# Altium PCB 8Relay.PcbDoc (part 1 of 2)
Units mm, origin at the board's own origin, x right, y up, seen from the top; angles counter-clockwise.
Board outline 164.68 x 100.38 mm, 2 copper layers (Top Layer, Bottom Layer); 122 components, 159 nets, 559 pads, 183 vias.
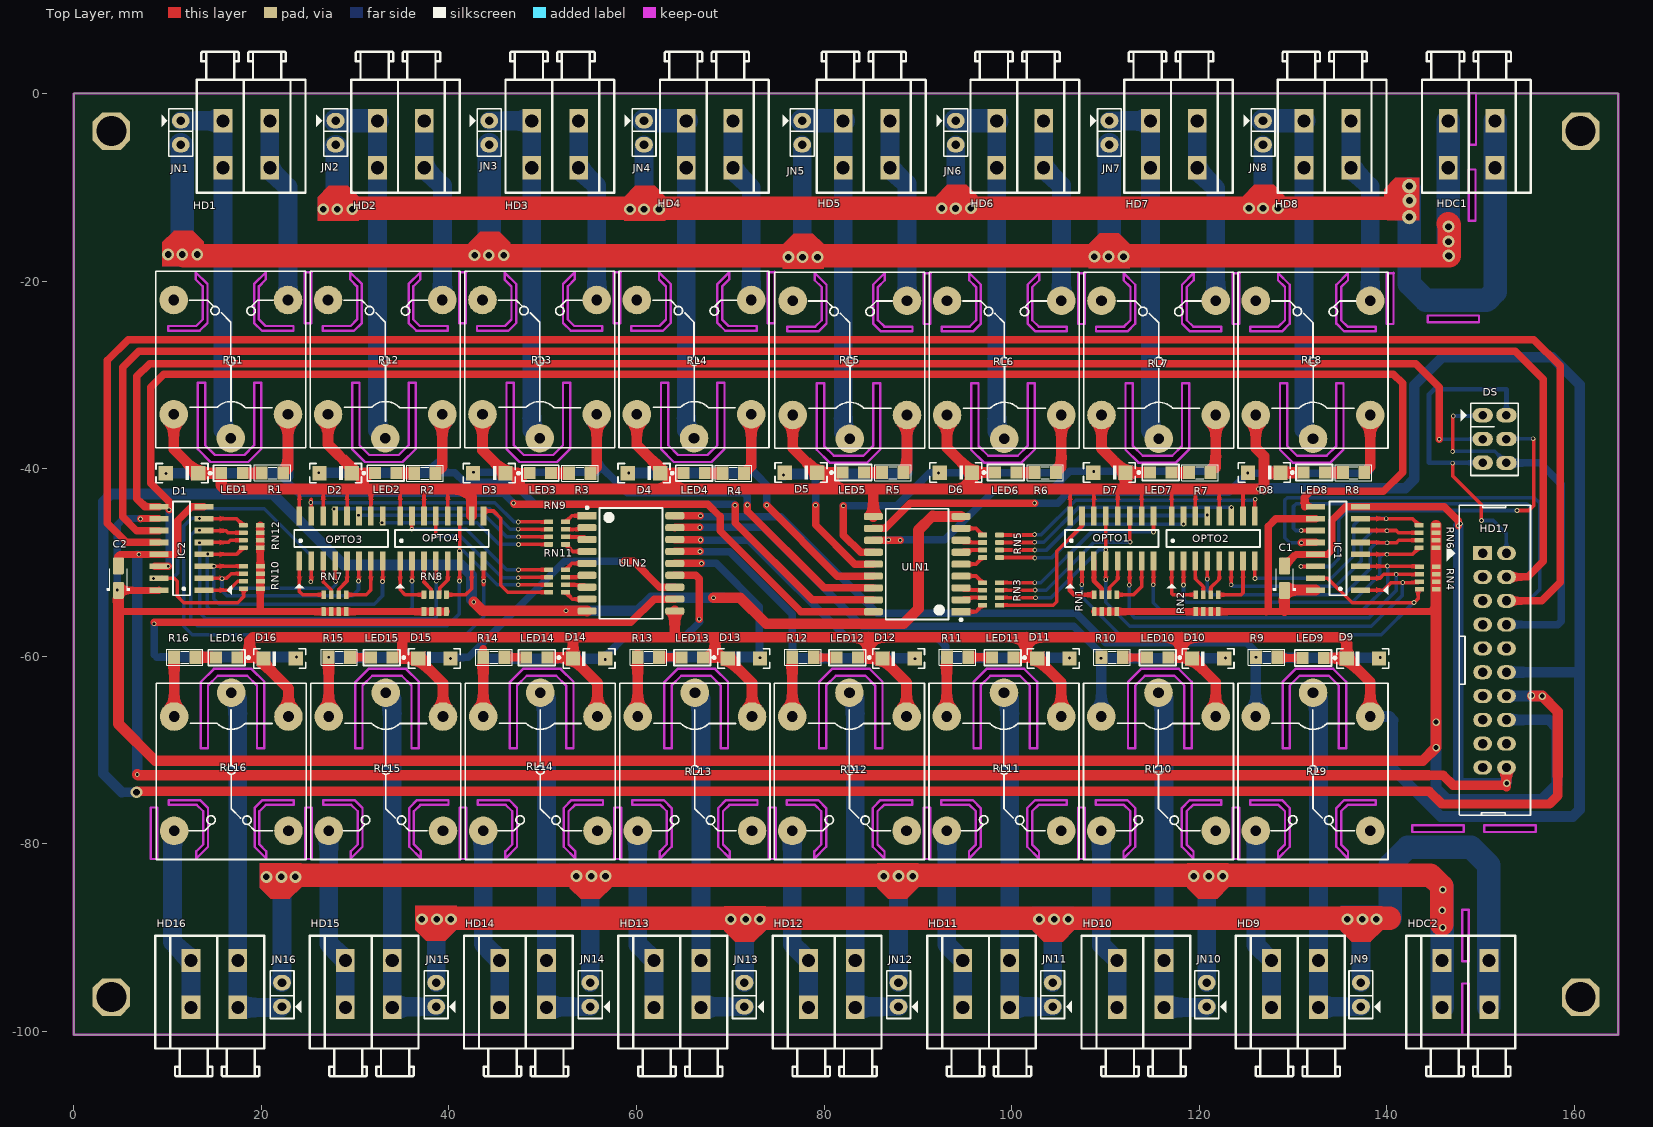
[diagram p0: Top Layer view]
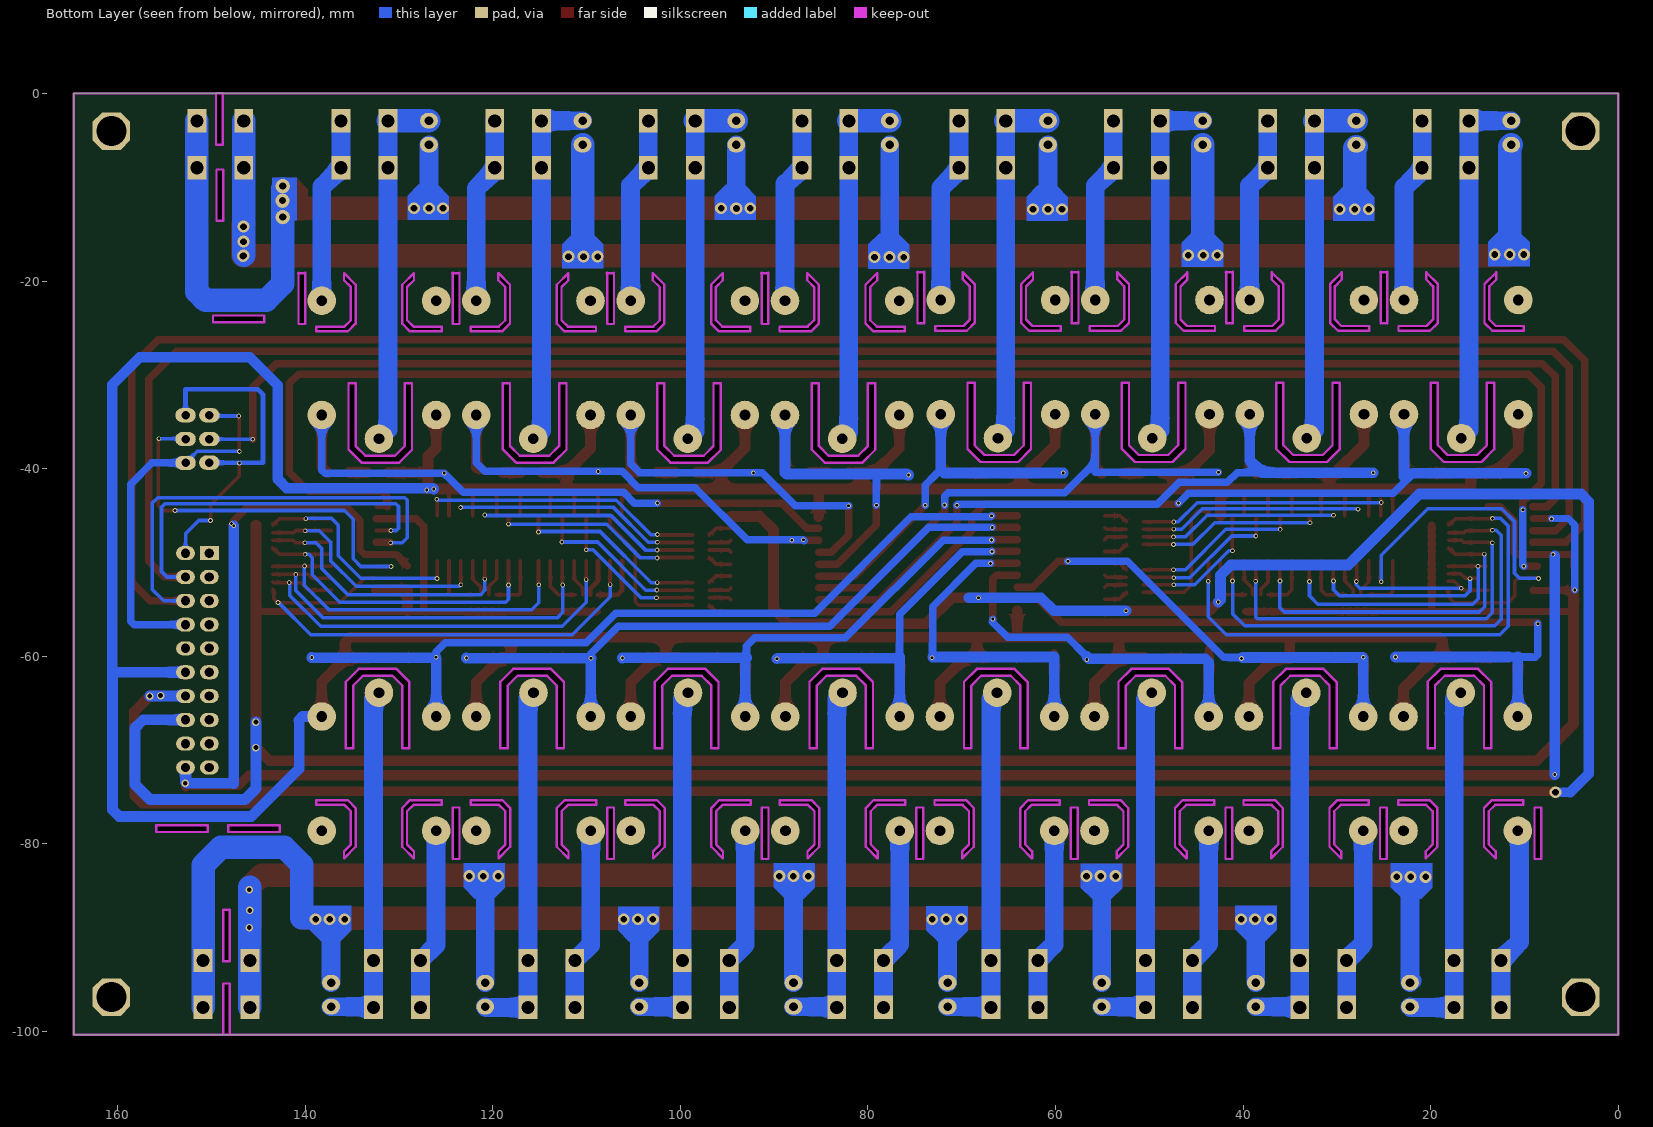
[diagram p1: Bottom Layer view, seen from below]

## Layer stack, top to bottom
Top Solder: solder mask 0.0102, Solder Resist, Dk 3.5
Top Layer: signal copper 0.0356
Dielectric 1: dielectric 0.32, FR-4, Dk 4.8
Bottom Layer: signal copper 0.0356
Bottom Solder: solder mask 0.0102, Solder Resist, Dk 3.5

## Board outline
0,-100.381 0,0 164.68,0 164.68,-100.381
cut-out: 144.367,-23.673 149.853,-23.673 149.853,-24.384 144.367,-24.384
cut-out: 150.412,-78.054 155.899,-78.054 155.899,-78.765 150.412,-78.765
cut-out: 142.716,-78.054 148.202,-78.054 148.202,-78.765 142.716,-78.765
cut-out: 124.276,-76.149 124.276,-81.636 123.564,-81.636 123.564,-76.149
cut-out: 138.83,-75.362 138.83,-75.87 135.833,-75.87 135.147,-76.556 135.147,-80.086 135.883,-80.823 135.883,-81.585 134.639,-80.34 134.639,-76.2 135.477,-75.362
cut-out: 125.469,-75.362 125.469,-75.87 128.467,-75.87 129.152,-76.556 129.152,-80.086 128.416,-80.823 128.416,-81.585 129.66,-80.34 129.66,-76.2 128.822,-75.362
cut-out: 107.795,-76.149 107.795,-81.636 107.083,-81.636 107.083,-76.149
cut-out: 122.349,-75.362 122.349,-75.87 119.352,-75.87 118.666,-76.556 118.666,-80.086 119.402,-80.823 119.402,-81.585 118.158,-80.34 118.158,-76.2 118.996,-75.362
cut-out: 108.988,-75.362 108.988,-75.87 111.986,-75.87 112.671,-76.556 112.671,-80.086 111.935,-80.823 111.935,-81.585 113.179,-80.34 113.179,-76.2 112.341,-75.362
cut-out: 91.314,-76.149 91.314,-81.636 90.602,-81.636 90.602,-76.149
cut-out: 105.868,-75.362 105.868,-75.87 102.871,-75.87 102.185,-76.556 102.185,-80.086 102.921,-80.823 102.921,-81.585 101.677,-80.34 101.677,-76.2 102.515,-75.362
cut-out: 92.507,-75.362 92.507,-75.87 95.505,-75.87 96.19,-76.556 96.19,-80.086 95.454,-80.823 95.454,-81.585 96.698,-80.34 96.698,-76.2 95.86,-75.362
cut-out: 74.833,-76.149 74.833,-81.636 74.121,-81.636 74.121,-76.149
cut-out: 89.387,-75.362 89.387,-75.87 86.39,-75.87 85.704,-76.556 85.704,-80.086 86.44,-80.823 86.44,-81.585 85.196,-80.34 85.196,-76.2 86.034,-75.362
cut-out: 76.026,-75.362 76.026,-75.87 79.024,-75.87 79.709,-76.556 79.709,-80.086 78.973,-80.823 78.973,-81.585 80.218,-80.34 80.218,-76.2 79.379,-75.362
cut-out: 58.352,-76.149 58.352,-81.636 57.641,-81.636 57.641,-76.149
cut-out: 72.906,-75.362 72.906,-75.87 69.909,-75.87 69.223,-76.556 69.223,-80.086 69.96,-80.823 69.96,-81.585 68.715,-80.34 68.715,-76.2 69.553,-75.362
cut-out: 59.546,-75.362 59.546,-75.87 62.543,-75.87 63.229,-76.556 63.229,-80.086 62.492,-80.823 62.492,-81.585 63.737,-80.34 63.737,-76.2 62.898,-75.362
cut-out: 41.871,-76.149 41.871,-81.636 41.16,-81.636 41.16,-76.149
cut-out: 56.425,-75.362 56.425,-75.87 53.428,-75.87 52.742,-76.556 52.742,-80.086 53.479,-80.823 53.479,-81.585 52.234,-80.34 52.234,-76.2 53.072,-75.362
cut-out: 43.065,-75.362 43.065,-75.87 46.062,-75.87 46.748,-76.556 46.748,-80.086 46.011,-80.823 46.011,-81.585 47.256,-80.34 47.256,-76.2 46.417,-75.362
cut-out: 25.39,-76.149 25.39,-81.636 24.679,-81.636 24.679,-76.149
cut-out: 39.944,-75.362 39.944,-75.87 36.947,-75.87 36.261,-76.556 36.261,-80.086 36.998,-80.823 36.998,-81.585 35.753,-80.34 35.753,-76.2 36.591,-75.362
cut-out: 26.584,-75.362 26.584,-75.87 29.581,-75.87 30.267,-76.556 30.267,-80.086 29.53,-80.823 29.53,-81.585 30.775,-80.34 30.775,-76.2 29.936,-75.362
cut-out: 8.909,-76.149 8.909,-81.636 8.198,-81.636 8.198,-76.149
cut-out: 23.463,-75.362 23.463,-75.87 20.466,-75.87 19.78,-76.556 19.78,-80.086 20.517,-80.823 20.517,-81.585 19.272,-80.34 19.272,-76.2 20.11,-75.362
cut-out: 10.103,-75.362 10.103,-75.87 13.1,-75.87 13.786,-76.556 13.786,-80.086 13.049,-80.823 13.049,-81.585 14.294,-80.34 14.294,-76.2 13.455,-75.362
cut-out: 140.024,-24.587 140.024,-19.101 140.735,-19.101 140.735,-24.587
cut-out: 125.469,-25.375 125.469,-24.867 128.467,-24.867 129.152,-24.181 129.152,-20.65 128.416,-19.914 128.416,-19.152 129.66,-20.396 129.66,-24.536 128.822,-25.375
cut-out: 138.83,-25.375 138.83,-24.867 135.833,-24.867 135.147,-24.181 135.147,-20.65 135.883,-19.914 135.883,-19.152 134.639,-20.396 134.639,-24.536 135.477,-25.375
cut-out: 123.556,-24.587 123.556,-19.101 124.267,-19.101 124.267,-24.587
cut-out: 109.002,-25.375 109.002,-24.867 111.999,-24.867 112.685,-24.181 112.685,-20.65 111.948,-19.914 111.948,-19.152 113.193,-20.396 113.193,-24.536 112.355,-25.375
cut-out: 122.362,-25.375 122.362,-24.867 119.365,-24.867 118.679,-24.181 118.679,-20.65 119.416,-19.914 119.416,-19.152 118.171,-20.396 118.171,-24.536 119.009,-25.375
cut-out: 107.088,-24.587 107.088,-19.101 107.8,-19.101 107.8,-24.587
cut-out: 92.534,-25.375 92.534,-24.867 95.531,-24.867 96.217,-24.181 96.217,-20.65 95.481,-19.914 95.481,-19.152 96.725,-20.396 96.725,-24.536 95.887,-25.375
cut-out: 105.895,-25.375 105.895,-24.867 102.897,-24.867 102.212,-24.181 102.212,-20.65 102.948,-19.914 102.948,-19.152 101.704,-20.396 101.704,-24.536 102.542,-25.375
cut-out: 90.621,-24.587 90.621,-19.101 91.332,-19.101 91.332,-24.587
cut-out: 76.066,-25.375 76.066,-24.867 79.064,-24.867 79.749,-24.181 79.749,-20.65 79.013,-19.914 79.013,-19.152 80.257,-20.396 80.257,-24.536 79.419,-25.375
cut-out: 89.427,-25.375 89.427,-24.867 86.43,-24.867 85.744,-24.181 85.744,-20.65 86.48,-19.914 86.48,-19.152 85.236,-20.396 85.236,-24.536 86.074,-25.375
cut-out: 74.009,-24.511 74.009,-19.025 74.72,-19.025 74.72,-24.511
cut-out: 59.455,-25.298 59.455,-24.79 62.452,-24.79 63.138,-24.105 63.138,-20.574 62.401,-19.837 62.401,-19.075 63.646,-20.32 63.646,-24.46 62.808,-25.298
cut-out: 72.815,-25.298 72.815,-24.79 69.818,-24.79 69.132,-24.105 69.132,-20.574 69.869,-19.837 69.869,-19.075 68.624,-20.32 68.624,-24.46 69.462,-25.298
cut-out: 57.541,-24.511 57.541,-19.025 58.253,-19.025 58.253,-24.511
cut-out: 42.987,-25.298 42.987,-24.79 45.984,-24.79 46.67,-24.105 46.67,-20.574 45.934,-19.837 45.934,-19.075 47.178,-20.32 47.178,-24.46 46.34,-25.298
cut-out: 56.348,-25.298 56.348,-24.79 53.35,-24.79 52.665,-24.105 52.665,-20.574 53.401,-19.837 53.401,-19.075 52.157,-20.32 52.157,-24.46 52.995,-25.298
cut-out: 41.074,-24.511 41.074,-19.025 41.785,-19.025 41.785,-24.511
cut-out: 26.52,-25.298 26.52,-24.79 29.517,-24.79 30.203,-24.105 30.203,-20.574 29.466,-19.837 29.466,-19.075 30.711,-20.32 30.711,-24.46 29.872,-25.298
cut-out: 39.88,-25.298 39.88,-24.79 36.883,-24.79 36.197,-24.105 36.197,-20.574 36.934,-19.837 36.934,-19.075 35.689,-20.32 35.689,-24.46 36.527,-25.298
cut-out: 23.412,-25.298 23.412,-24.79 20.415,-24.79 19.729,-24.105 19.729,-20.574 20.466,-19.837 20.466,-19.075 19.221,-20.32 19.221,-24.46 20.059,-25.298
cut-out: 10.052,-25.298 10.052,-24.79 13.049,-24.79 13.735,-24.105 13.735,-20.574 12.998,-19.837 12.998,-19.075 14.243,-20.32 14.243,-24.46 13.405,-25.298
cut-out: 14.573,-39.294 13.201,-37.922 13.201,-30.836 13.989,-30.836 13.989,-37.516 15.03,-38.557 18.18,-38.557 19.221,-37.516 19.221,-30.836 19.983,-30.836 19.983,-37.897 18.586,-39.294
cut-out: 18.942,-61.366 20.313,-62.738 20.313,-69.825 19.526,-69.825 19.526,-63.144 18.485,-62.103 15.335,-62.103 14.294,-63.144 14.294,-69.825 13.532,-69.825 13.532,-62.763 14.929,-61.366
cut-out: 35.423,-61.366 36.794,-62.738 36.794,-69.825 36.007,-69.825 36.007,-63.144 34.966,-62.103 31.816,-62.103 30.775,-63.144 30.775,-69.825 30.013,-69.825 30.013,-62.763 31.41,-61.366
cut-out: 51.904,-61.366 53.275,-62.738 53.275,-69.825 52.488,-69.825 52.488,-63.144 51.447,-62.103 48.297,-62.103 47.256,-63.144 47.256,-69.825 46.494,-69.825 46.494,-62.763 47.891,-61.366
cut-out: 68.385,-61.366 69.756,-62.738 69.756,-69.825 68.969,-69.825 68.969,-63.144 67.928,-62.103 64.778,-62.103 63.737,-63.144 63.737,-69.825 62.975,-69.825 62.975,-62.763 64.372,-61.366
cut-out: 84.866,-61.366 86.237,-62.738 86.237,-69.825 85.45,-69.825 85.45,-63.144 84.408,-62.103 81.259,-62.103 80.217,-63.144 80.217,-69.825 79.455,-69.825 79.455,-62.763 80.852,-61.366
cut-out: 101.347,-61.366 102.718,-62.738 102.718,-69.825 101.931,-69.825 101.931,-63.144 100.889,-62.103 97.74,-62.103 96.698,-63.144 96.698,-69.825 95.936,-69.825 95.936,-62.763 97.333,-61.366
cut-out: 117.828,-61.366 119.199,-62.738 119.199,-69.825 118.412,-69.825 118.412,-63.144 117.37,-62.103 114.221,-62.103 113.179,-63.144 113.179,-69.825 112.417,-69.825 112.417,-62.763 113.814,-61.366
cut-out: 134.309,-61.366 135.68,-62.738 135.68,-69.825 134.893,-69.825 134.893,-63.144 133.851,-62.103 130.702,-62.103 129.66,-63.144 129.66,-69.825 128.898,-69.825 128.898,-62.763 130.295,-61.366
cut-out: 129.991,-39.37 128.619,-37.998 128.619,-30.912 129.406,-30.912 129.406,-37.592 130.448,-38.633 133.597,-38.633 134.639,-37.592 134.639,-30.912 135.401,-30.912 135.401,-37.973 134.004,-39.37
cut-out: 113.523,-39.37 112.151,-37.998 112.151,-30.912 112.939,-30.912 112.939,-37.592 113.98,-38.633 117.13,-38.633 118.171,-37.592 118.171,-30.912 118.933,-30.912 118.933,-37.973 117.536,-39.37
cut-out: 97.055,-39.37 95.684,-37.998 95.684,-30.912 96.471,-30.912 96.471,-37.592 97.513,-38.633 100.662,-38.633 101.704,-37.592 101.704,-30.912 102.466,-30.912 102.466,-37.973 101.069,-39.37
cut-out: 80.588,-39.37 79.216,-37.998 79.216,-30.912 80.003,-30.912 80.003,-37.592 81.045,-38.633 84.194,-38.633 85.236,-37.592 85.236,-30.912 85.998,-30.912 85.998,-37.973 84.601,-39.37
cut-out: 63.976,-39.294 62.604,-37.922 62.604,-30.836 63.392,-30.836 63.392,-37.516 64.433,-38.557 67.583,-38.557 68.624,-37.516 68.624,-30.836 69.386,-30.836 69.386,-37.897 67.989,-39.294
cut-out: 31.041,-39.294 29.669,-37.922 29.669,-30.836 30.457,-30.836 30.457,-37.516 31.498,-38.557 34.648,-38.557 35.689,-37.516 35.689,-30.836 36.451,-30.836 36.451,-37.897 35.054,-39.294
cut-out: 47.508,-39.294 46.137,-37.922 46.137,-30.836 46.924,-30.836 46.924,-37.516 47.966,-38.557 51.115,-38.557 52.157,-37.516 52.157,-30.836 52.919,-30.836 52.919,-37.897 51.522,-39.294
cut-out: 24.606,-24.511 24.606,-19.025 25.317,-19.025 25.317,-24.511
cut-out: 148.812,-5.461 148.812,0.025 149.523,0.025 149.523,-5.461
cut-out: 148.761,-13.589 148.761,-8.103 149.472,-8.103 149.472,-13.589
cut-out: 148.05,-100.406 148.05,-94.92 148.761,-94.92 148.761,-100.406
cut-out: 148.05,-92.532 148.05,-87.046 148.761,-87.046 148.761,-92.532

## Design rules (kind name [scope] priority, off if disabled: settings)
Clearance [All] p1: gap=0.254
PlaneConnect [All] p1: planeconnectstyle=Relief reliefexpansion=0.508 reliefentries=4 reliefconductorwidth=0.5 reliefairgap=0.254
PolygonConnect [All] p1: connectstyle=Relief reliefconductorwidth=0.5 reliefentries=4 polygonreliefangle="45 Angle" airgapwidth=0.254
RoomDefinition 8Relay [InComponentClass('8Relay')] p1: confinementstyle=ConfineIn formatcopy=TRUE lockcomponents=FALSE outline -115.831,-248.336 -65.031,-248.336 -65.031,-222.936 -115.831,-222.936
RoutingVias RoutingVias_1 [All] p1: holewidth=0.711 width=1.27 viastyle="Through Hole" minholewidth=0.711 minwidth=1.27 maxholewidth=0.711 maxwidth=1.27
RoutingVias [All] p2: holewidth=0.3 width=0.5 viastyle="Through Hole" minholewidth=0.3 minwidth=0.5 maxholewidth=0.3 maxwidth=0.5
SolderMaskExpansion [All] p1: expansion=0.102
Width Width_1 [All] p1: maxlimit=2.5 minlimit=0.5 preferedwidth=1
Width [All] p2: maxlimit=1.143 minlimit=0.381 preferedwidth=0.8
29 further rules are at their usual default settings.

## Components (designator, comment, footprint, x,y, rotation, side; value= is the part's Value field where it differs from the comment)
C1 "10uF/16V" CAPMP3216X180N 129.102,-51.689 r90 top
C2 "10uF/16V" CAPMP3216X180N 4.743,-51.689 r90 top
D1 "1N4148" 1N4148_SMD 11.525,-40.5 r0 top
D2 "1N4148" 1N4148_SMD 27.908,-40.5 r0 top
D3 "1N4148" 1N4148_SMD 44.291,-40.5 r0 top
D4 "1N4148" 1N4148_SMD 60.801,-40.5 r0 top
D5 "1N4148" 1N4148_SMD 77.54,-40.437 r0 top
D6 "1N4148" 1N4148_SMD 94.05,-40.437 r0 top
D7 "1N4148" 1N4148_SMD 110.433,-40.437 r0 top
D8 "1N4148" 1N4148_SMD 126.943,-40.437 r0 top
D9 "1N4148" 1N4148_SMD 137.458,-60.249 r180 top
D10 "1N4148" 1N4148_SMD 120.955,-60.249 r180 top
D11 "1N4148" 1N4148_SMD 104.453,-60.249 r180 top
D12 "1N4148" 1N4148_SMD 87.95,-60.249 r180 top
D13 "1N4148" 1N4148_SMD 71.447,-60.249 r180 top
D14 "1N4148" 1N4148_SMD 54.945,-60.249 r180 top
D15 "1N4148" 1N4148_SMD 38.442,-60.249 r180 top
D16 "1N4148" 1N4148_SMD 21.939,-60.249 r180 top
DS "Connector 3x2" JP3x2 151.504,-36.855 r270 top
HD1 "RL-OUT" "KF211V- 2" 23.095,-10.566 r180 top
HD2 "RL-OUT" "KF211V- 2" 39.563,-10.566 r180 top
HD3 "RL-OUT" "KF211V- 2" 56.03,-10.566 r180 top
HD4 "RL-OUT" "KF211V- 2" 72.498,-10.566 r180 top
HD5 "RL-OUT" "KF211V- 2" 89.237,-10.566 r180 top
HD6 "RL-OUT" "KF211V- 2" 105.62,-10.566 r180 top
HD7 "RL-OUT" "KF211V- 2" 122.003,-10.566 r180 top
HD8 "RL-OUT" "KF211V- 2" 138.386,-10.566 r180 top
HD9 "RL-OUT" "KF211V- 2" 125.52,-89.814 r0 top
HD10 "RL-OUT" "KF211V- 2" 109.057,-89.814 r0 top
HD11 "RL-OUT" "KF211V- 2" 92.595,-89.814 r0 top
HD12 "RL-OUT" "KF211V- 2" 76.132,-89.814 r0 top
HD13 "RL-OUT" "KF211V- 2" 59.669,-89.814 r0 top
HD14 "RL-OUT" "KF211V- 2" 43.206,-89.814 r0 top
HD15 "RL-OUT" "KF211V- 2" 26.743,-89.814 r0 top
HD16 "RL-OUT" "KF211V- 2" 10.28,-89.814 r0 top
HD17 "Header 10x2" Hed2X10S 150.234,-49.022 r270 top
HDC1 "Header 2" "KF211V- 2" 153.765,-10.566 r180 top
HDC2 "Header 2" "KF211V- 2" 143.707,-89.814 r0 top
IC1 "74HC595" SO-16 134.817,-48.514 r180 top
IC2 "74HC595" SO-16 11.474,-48.514 r180 top
JN1 "Jumper 2" JP2 11.398,-2.896 r270 top
JN2 "Jumper 2" JP2 27.908,-2.896 r270 top
JN3 "Jumper 2" JP2 44.291,-2.896 r270 top
JN4 "Jumper 2" JP2 60.801,-2.896 r270 top
JN5 "Jumper 2" JP2 77.667,-2.896 r270 top
JN6 "Jumper 2" JP2 94.05,-2.896 r270 top
JN7 "Jumper 2" JP2 110.433,-2.896 r270 top
JN8 "Jumper 2" JP2 126.816,-2.896 r270 top
JN9 "Jumper 2" JP2 137.255,-97.384 r90 top
JN10 "Jumper 2" JP2 120.818,-97.384 r90 top
JN11 "Jumper 2" JP2 104.38,-97.384 r90 top
JN12 "Jumper 2" JP2 87.943,-97.384 r90 top
JN13 "Jumper 2" JP2 71.505,-97.384 r90 top
JN14 "Jumper 2" JP2 55.068,-97.384 r90 top
JN15 "Jumper 2" JP2 38.63,-97.384 r90 top
JN16 "Jumper 2" JP2 22.193,-97.384 r90 top
LED1 "LED" LED0805 16.859,-40.488 r0 top
LED2 "LED" LED0805 33.242,-40.488 r0 top
LED3 "LED" LED0805 49.752,-40.488 r0 top
LED4 "LED" LED0805 66.135,-40.488 r0 top
LED5 "LED" LED0805 83.128,-40.424 r0 top
LED6 "LED" LED0805 99.384,-40.424 r0 top
LED7 "LED" LED0805 115.894,-40.424 r0 top
LED8 "LED" LED0805 132.277,-40.424 r0 top
LED9 "LED" LED0805 132.15,-60.198 r180 top
LED10 "LED" LED0805 115.596,-60.158 r180 top
LED11 "LED" LED0805 99.043,-60.158 r180 top
LED12 "LED" LED0805 82.489,-60.158 r180 top
LED13 "LED" LED0805 65.935,-60.158 r180 top
LED14 "LED" LED0805 49.382,-60.158 r180 top
LED15 "LED" LED0805 32.828,-60.158 r180 top
LED16 "LED" LED0805 16.275,-60.158 r180 top
OPTO1 "TLP2904" SO-16 110.687,-47.447 r90 top
OPTO2 "TLP2904" SO-16 121.507,-47.447 r90 top
OPTO3 "TLP2904" SO-16 28.492,-47.447 r90 top
OPTO4 "TLP2904" SO-16 39.236,-47.447 r90 top
R1 "1k" SM-0805 21.177,-40.475 r180 top
R2 "1k" SM-0805 37.433,-40.5 r180 top
R3 "1k" SM-0805 53.943,-40.5 r180 top
R4 "1k" SM-0805 70.326,-40.5 r180 top
R5 "1k" SM-0805 87.319,-40.437 r180 top
R6 "1k" SM-0805 103.575,-40.437 r180 top
R7 "1k" SM-0805 120.085,-40.437 r180 top
R8 "1k" SM-0805 136.468,-40.437 r180 top
R9 "1k" SM-0805 127.197,-60.122 r0 top
R10 "1k" SM-0805 110.716,-60.122 r0 top
R11 "1k" SM-0805 94.235,-60.122 r0 top
R12 "1k" SM-0805 77.754,-60.122 r0 top
R13 "1k" SM-0805 61.273,-60.122 r0 top
R14 "1k" SM-0805 44.792,-60.122 r0 top
R15 "1k" SM-0805 28.311,-60.122 r0 top
R16 "1k" SM-0805 11.83,-60.122 r0 top
RL1 "Relay 10A/12V" RL_SPDT_10A 16.732,-36.754 r90 top
RL2 "Relay 10A/12V" RL_SPDT_10A 33.2,-36.754 r90 top
RL3 "Relay 10A/12V" RL_SPDT_10A 49.667,-36.754 r90 top
RL4 "Relay 10A/12V" RL_SPDT_10A 66.135,-36.754 r90 top
RL5 "Relay 10A/12V" RL_SPDT_10A 82.747,-36.83 r90 top
RL6 "Relay 10A/12V" RL_SPDT_10A 99.214,-36.83 r90 top
RL7 "Relay 10A/12V" RL_SPDT_10A 115.682,-36.83 r90 top
RL8 "Relay 10A/12V" RL_SPDT_10A 132.15,-36.83 r90 top
RL9 "Relay 10A/12V" RL_SPDT_10A 132.15,-63.906 r270 top
RL10 "Relay 10A/12V" RL_SPDT_10A 115.669,-63.906 r270 top
RL11 "Relay 10A/12V" RL_SPDT_10A 99.188,-63.906 r270 top
RL12 "Relay 10A/12V" RL_SPDT_10A 82.707,-63.906 r270 top
RL13 "Relay 10A/12V" RL_SPDT_10A 66.226,-63.906 r270 top
RL14 "Relay 10A/12V" RL_SPDT_10A 49.745,-63.906 r270 top
RL15 "Relay 10A/12V" RL_SPDT_10A 33.264,-63.906 r270 top
RL16 "Relay 10A/12V" RL_SPDT_10A 16.783,-63.906 r270 top
RN1 "100" "RES P4 Dual 0805/2012" 110.026,-54.356 r90 top
RN2 "100" "RES P4 Dual 0805/2012" 120.847,-54.356 r90 top
RN3 "1K" "RES P4 Dual 0805/2012" 97.809,-53.365 r180 top
RN4 "1k" "RES P4 Dual 0805/2012" 144.392,-51.664 r180 top
RN5 "1K" "RES P4 Dual 0805/2012" 97.809,-48.285 r180 top
RN6 "1k" "RES P4 Dual 0805/2012" 144.367,-47.244 r180 top
RN7 "100" "RES P4 Dual 0805/2012" 27.832,-54.356 r90 top
RN8 "100" "RES P4 Dual 0805/2012" 38.525,-54.356 r90 top
RN9 "1K" "RES P4 Dual 0805/2012" 51.53,-46.888 r0 top
RN10 "1k" "RES P4 Dual 0805/2012" 18.993,-51.613 r180 top
RN11 "1K" "RES P4 Dual 0805/2012" 51.53,-51.994 r0 top
RN12 "1k" "RES P4 Dual 0805/2012" 18.967,-47.244 r180 top
ULN1 "ULN2803A" SOIC127P750X1175-18N 89.935,-50.19 r180 top
ULN2 "ULN2803A" SOIC127P750X1175-18N 59.404,-50.114 r0 top

## Footprints (in the part's own frame and the unit in brackets; to place one, negate y for a bottom-side part, rotate by r counter-clockwise, add the part's x,y. Pads: shape width x height; smd on the part's side, far side on the other; paste and mask are expansions set on the pad)
1N4148_SMD [mil]
  rect 60x60 smd: 1(-67.91,0) 2(67.91,0)
  silkscreen extent -109,-40 109,41, body extent -71,-23 67,25, height 47
CAPMP3216X180N [mm] "Capacitor, polarized, Molded Body, EIA 535BAAC size A; 3.20mm L X 1.60mm W X 1.80mm H"
  round 0.508 on Mech14: 0(0,0)
  rrect25% 1.8x1.2 smd: 1(-1.3,0) 2(1.3,0)
  silkscreen extent -1.3,-1.2 1,1.2, body extent -1.6,-0.8 1.6,0.8, height 1.8
Hed2X10S [mm] "Header 10x2,20 pin, connecter"
  rect 1.5x2 hole 1: 1(0,0)
  oval 1.5x2 hole 1: 2(2.54,0) 3(5.08,0) 4(7.62,0) 5(10.16,0) 6(12.7,0) 7(15.24,0) 8(17.78,0) 9(20.32,0) 10(22.86,0) 11(0,2.54) 12(2.54,2.54) 13(5.08,2.54) 14(7.62,2.54) 15(10.16,2.54) 16(12.7,2.54) 17(15.24,2.54) 18(17.78,2.54) 19(20.32,2.54) 20(22.86,2.54)
  silkscreen extent -5.1,-3.81 27.94,5.1
JP2 [mil]
  oval 65x75 hole 36: 1(0,0) 2(101,0)
  silkscreen extent -50,-81 150,50, body extent -48,-50 148,48, height 323
JP3x2 [mil] "Connector 3x2"
  oval 60x86 hole 36: 1(-100,-50) 2(0,-50) 3(99,-50) 4(-100,50) 5(0,50) 6(100,50)
  silkscreen extent -150,-141 153,100, body extent -150,-100 150,100, height 335
"KF211V- 2" [mm] "KF211V/R-5.0"
  rect 2x2.5 hole 1.4: 1(2.2,-2.65) 1(2.2,-7.65) 2(7.2,-2.65) 2(7.2,-7.65)
  silkscreen extent -1.6,-15 10,0
LED0805 [mil] "Chip Resistor; Body 2.0 x 1.3 mm (LxW typ)"
  rect 50x50 smd: 1(-45,0) 2(45,0)
  silkscreen extent -97,-33 77,33, body extent -60,-25 60,25, height 47
"RES P4 Dual 0805/2012" [mm]
  round 0.254 on Mech15: 0(0,0)
  rrect25% 0.95x0.5 smd: 1(-0.9,1.2) 2(-0.9,0.4) 3(-0.9,-0.4) 4(-0.9,-1.2) 5(0.9,-1.2) 6(0.9,-0.4) 7(0.9,0.4) 8(0.9,1.2)
  Top Layer pour cut-out: -0.4,1.7 0.4,1.7 0.4,-1.7 -0.4,-1.7
  body extent -0.87,-1.68 0.88,1.67, height 0.7
RL_SPDT_10A [mil] "Relay SPDT, 5 pin, 10A,W 650mil, L 800mil, H 800mil"
  round 120 hole 45: 1(0,0) 2(580,240) 3(580,-240) 4(100,-240) 5(100,240)
  silkscreen extent -40,-315 700,315, body extent -40,-315 700,315, height 630
SM-0805 [mil] "Compoment SMD 80x50mil"
  rect 50x55 smd: 1(-45,0) 2(45,0)
  silkscreen extent -77,-34 76,33, body extent -40,-27 40,23, height 24
SO-16 [mm] "SOIC, 16-Leads, Body 9.9x3.9mm, Pitch 1.27mm, IPC Medium Density"
  rect 2x0.6 smd: 1(-2.4,4.445) 2(-2.4,3.175) 3(-2.4,1.905) 4(-2.4,0.635) 5(-2.4,-0.635) 6(-2.4,-1.905) 7(-2.4,-3.175) 8(-2.4,-4.445) 9(2.4,-4.445) 10(2.4,-3.175) 11(2.4,-1.905) 12(2.4,-0.635) 13(2.4,0.635) 14(2.4,1.905) 15(2.4,3.175) 16(2.4,4.445)
  silkscreen extent -5.33,-5 0.9,5, body extent -3.52,-4.95 3.54,4.95, height 1.75
SOIC127P750X1175-18N [mil] "SOIC, 18-Leads, Body 11.75x7.50mm, Pitch 1.27mm, IPC Medium Density"
  rect 80x30 smd: 1(-184.06,200)
  rrect50% 80x30 smd: 2(-184.06,150) 3(-184.06,100) 4(-184.06,50) 5(-184.06,0) 6(-184.06,-50) 7(-184.06,-100) 8(-184.06,-150) 9(-184.06,-200) 10(184.06,-200) 11(184.06,-150) 12(184.06,-100) 13(184.06,-50) 14(184.06,0) 15(184.06,50) 16(184.06,100) 17(184.06,150) 18(184.06,200)
  silkscreen extent -189,-232 132,238, body extent -200,-227 207,227, height 101

## Part data
C1 C2: library part CP3, "Cap 100uF/35V - 470uF/16V"
D1 D2 D3 D4 D5 D6 D7 D8 D9 D10 D11 D12 D13 D14 D15 D16: library part D1A, "Diode 1A"
DS: library part JP3x2
HD1 HD2 HD3 HD4 HD5 HD6 HD7 HD8 HD9 HD10 HD11 HD12 HD13 HD14 HD15 HD16 HDC1 HDC2: library part Hed2, "Header 2 (Green)"
HD17: library part HED10X2
IC1 IC2: library part 74595, "8 Bit Serial input - Parallel Output"
JN1 JN2 JN3 JN4 JN5 JN6 JN7 JN8 JN9 JN10 JN11 JN12 JN13 JN14 JN15 JN16: library part "JP 2"
LED1 LED2 LED3 LED4 LED5 LED6 LED7 LED8 LED9 LED10 LED11 LED12 LED13 LED14 LED15 LED16: "LED Single colour Green and Red"
OPTO1 OPTO2 OPTO3 OPTO4: library part "PC817 x 4", "PC817 OPTO"
R1 R2 R3 R4 R5 R6 R7 R8 R9 R10 R11 R12 R13 R14 R15 R16: library part R, "Resistor 1/4W"
RL1 RL2 RL3 RL4 RL5 RL6 RL7 RL8 RL9 RL10 RL11 RL12 RL13 RL14 RL15 RL16: library part "Relay 1", "Relay SPDT,10A - 12VDC 5 Pin"
RN1 RN2 RN3 RN4 RN5 RN6 RN7 RN8 RN9 RN10 RN11 RN12: library part "Respack 4 Dual"
ULN1 ULN2: "High-Voltage, High-Current Darlington Array"

## Free pads (board coordinates)
  oct 4x4 hole 3.2: 0(4,-96.381) 0(4,-4) 0(160.68,-96.366) 0(160.68,-4)
  round 1.524 hole 0.762: 0(142.411,-9.881) 1(142.411,-13.183) 1(142.437,-11.43)

## Via types
v1: diameter 0.5, hole 0.3, Top Layer to Bottom Layer, 121 vias
v2: diameter 1.27, hole 0.711, Top Layer to Bottom Layer, 54 vias
v3: diameter 0.8, hole 0.5, Top Layer to Bottom Layer, 8 vias

## Nets (pads, with @x,y where several pads share a name; then routed paths per layer and width w, separated by ;. In a path a pad name is that pad's centre, name@x,y a point inside that pad or via, vN(x,y) a via of type N, cw(c..) or ccw(c..) an arc to the next point about the centre after c; other vN are vias at no path point)
2N_CHAN: HDC2.1 JN10.2 JN12.2 JN14.2 JN16.2 | length 189.3
  Top Layer w2.5: v2@21.05,-83.363 119.424,-83.363 144.672,-83.363 145.866,-84.557 v3@145.866,-88.595
  Bottom Layer w2: v2@21.914,-83.363 v2@22.044,-83.493 ; JN16.2@21.99,-94.615 JN16.2@22.193,-94.818 v2@22.193,-83.134 ; v2@22.015,-83.566 v2@22.117,-83.464 ; JN14.2@55.068,-94.818 55.068,-83.457 v2@55.213,-83.312 ; v2@55.086,-83.617 v2@55.188,-83.515 ; v2@87.801,-83.439 87.943,-83.581 JN12.2@87.943,-94.818 ; v2@87.852,-83.566 v2(87.954,-83.464) ; v2@120.796,-83.439 120.818,-83.461 JN10.2@120.818,-94.818 ; v2@120.923,-83.591 v2@121.024,-83.49
  Bottom Layer w2.5: HDC2.1@145.907,-97.464 HDC2.1@145.907,-92.464 v3@145.907,-84.668
  other v2: 20.517,-83.541 22.117,-83.541 23.615,-83.541 53.587,-83.464 55.188,-83.464 56.686,-83.464 86.353,-83.464 89.452,-83.464 119.424,-83.464 121.024,-83.464 122.523,-83.464
  other v3: 145.967,-88.951 145.942,-87.122 145.993,-84.912
2N_LE: HDC2.2 JN9.2 JN11.2 JN13.2 JN15.2 | length 166.2
  Top Layer w2.5: v2@38.63,-87.96 40.202,-87.96 102.94,-87.96 140.303,-87.96
  Bottom Layer w2: v2@38.5,-87.884 38.63,-88.015 JN15.2@38.63,-94.818 ; v2@38.601,-88.087 v2@38.703,-87.986 ; v2@71.444,-88.062 71.505,-88.123 JN13.2@71.505,-94.818 ; v2@71.545,-88.163 v2(71.647,-88.062) ; v2@104.311,-88.011 104.38,-88.08 JN11.2@104.38,-94.818 ; v2@104.438,-88.189 v2@104.54,-88.087 ; JN9.2@137.255,-94.818 137.255,-88.24 v2@137.28,-88.214 ; v2@137.306,-88.113 v2@137.407,-88.011
  Bottom Layer w2.5: 137.255,-89.687 139.033,-87.909 140.379,-87.909 140.379,-82.267 142.249,-80.396 148.995,-80.396 150.907,-82.308 HDC2.2@150.907,-92.464 HDC2.2@150.907,-97.464
  other v2: 37.103,-88.062 38.703,-88.062 40.202,-88.062 70.047,-88.062 73.145,-88.062 102.94,-88.062 104.54,-88.062 106.038,-88.062 135.807,-88.062 137.407,-88.062 138.906,-88.062
2QA: IC2.15 OPTO3.2 RN10.8 | length 43
  Top Layer w0.381: v1(8.477,-51.714) 8.502,-51.689 IC2.15@9.074,-51.689 10.687,-51.689 11.017,-52.019 11.017,-53.594 11.728,-54.305 17.458,-54.305 18.093,-53.67 RN10.8@18.093,-52.813 ; v1(25.266,-52.07) 25.317,-52.019 OPTO3.2@25.317,-49.847
  Bottom Layer w0.381: v1(8.477,-51.714) 10.509,-51.714 11.042,-51.181 11.042,-45.644 12.414,-44.272 20.288,-44.272 25.266,-49.251 v1(25.266,-52.07)
2QA+: OPTO3.1 RN7.8 | length 6
  Top Layer w0.381: OPTO3.1@24.047,-49.847 24.047,-53.111 24.392,-53.456 RN7.8@26.632,-53.456
2QA-OUT: OPTO3.15 RN9.1 | length 28.3
  Top Layer w0.381: v1(25.266,-43.612) 25.266,-43.332 25.317,-43.282 OPTO3.15@25.317,-45.047 ; v1@47.396,-45.688 RN9.1@50.63,-45.688
  Bottom Layer w0.381: v1(25.266,-43.612) 25.283,-43.629 44.892,-43.629 46.958,-45.695 v1(47.39,-45.695)
2QB: IC2.1 OPTO3.4 RN10.7 | length 18.5
  Top Layer w0.381: IC2.1@13.874,-52.959 16.529,-52.959 v1(16.732,-52.756) 17.475,-52.013 RN10.7@18.093,-52.013 ; OPTO3.4@27.857,-49.847 27.857,-51.994 v1(27.908,-52.045)
  Bottom Layer w0.381: v1(16.732,-52.756) 24.97,-52.756 24.979,-52.765 25.554,-52.765 25.563,-52.756 27.552,-52.756 27.908,-52.4 v1(27.908,-52.045)
2QB+: OPTO3.3 RN7.7 | length 4
  Top Layer w0.381: OPTO3.3@26.587,-49.847 26.587,-52.121 26.638,-52.121 27.432,-52.915 RN7.7@27.432,-53.456
2QB-OUT: OPTO3.13 RN9.2 | length 23.8
  Top Layer w0.381: v1(47.39,-46.457) 47.422,-46.488 RN9.2@50.63,-46.488
  Bottom Layer w0.381: v1(27.73,-44.323) 27.781,-44.272 44.342,-44.272 46.526,-46.457 v1(47.39,-46.457)
2QC: IC2.2 OPTO3.6 RN10.6 | length 22.8
  Top Layer w0.381: 14.903,-51.714 16.275,-51.714 16.776,-51.213 RN10.6@18.093,-51.213 ; v1(30.346,-51.994) 30.397,-51.943 OPTO3.6@30.397,-49.847
  Bottom Layer w0.381: v1(15.792,-51.74) 15.792,-53.035 16.326,-53.569 29.711,-53.569 30.346,-52.934 v1(30.346,-51.994)
2QC+: OPTO3.5 RN7.6 | length 4
  Top Layer w0.381: RN7.6@28.232,-53.456 28.232,-52.889 29.127,-51.994 OPTO3.5@29.127,-49.847
2QC-OUT: OPTO3.11 RN9.3 | length 21.2
  Top Layer w0.381: v1(47.415,-47.288) RN9.3@50.63,-47.288
  Bottom Layer w0.381: v1(30.346,-44.983) 43.821,-44.983 46.126,-47.288 v1(47.415,-47.288)
2QD: IC2.3 OPTO3.8 RN10.5 | length 29.8
  Top Layer w0.381: IC2.3@14.04,-50.413 RN10.5@18.093,-50.413 ; v1(32.912,-52.045) 32.937,-52.019 OPTO3.8@32.937,-49.847
  Bottom Layer w0.381: v1(14.929,-50.419) 14.929,-53.873 15.513,-54.458 32.023,-54.458 32.912,-53.569 v1(32.912,-52.045)
2QD+: OPTO3.7 RN7.5 | length 6
  Top Layer w0.381: RN7.5@29.032,-53.456 31.17,-53.456 31.667,-52.959 OPTO3.7@31.667,-49.847
2QD-OUT: OPTO3.9 RN9.4 | length 19.5
  Top Layer w0.381: v1(32.861,-45.771) 32.861,-45.123 OPTO3.9@32.937,-45.047 ; v1(47.415,-48.088) RN9.4@50.63,-48.088
  Bottom Layer w0.381: v1(32.861,-45.771) 43.021,-45.771 45.339,-48.088 v1(47.415,-48.088)
2QE: IC2.4 OPTO4.2 RN12.8 | length 36.9
  Top Layer w0.381: v1(14.268,-49.124) 17.388,-49.124 RN12.8@18.067,-48.444 ; v1(36.061,-51.994) OPTO4.2@36.061,-49.847
  Bottom Layer w0.381: v1(14.268,-49.124) 14.234,-49.158 14.234,-54.728 14.802,-55.296 35.604,-55.296 36.061,-54.839 v1(36.061,-51.994)
2QE+: OPTO4.1 RN8.8 | length 5.8
  Top Layer w0.381: OPTO4.1@34.791,-49.847 34.791,-52.934 35.314,-53.456 RN8.8@37.325,-53.456
2QE-OUT: OPTO4.15 RN11.1 | length 17.9
  Top Layer w0.381: v1(36.036,-46.482) 36.036,-45.073 OPTO4.15@36.061,-45.047 ; v1@47.407,-50.868 v1(47.407,-50.794) RN11.1@50.63,-50.794
  Bottom Layer w0.381: v1(36.036,-46.482) 41.827,-46.482 46.139,-50.794 v1(47.407,-50.794)
2QF: IC2.5 OPTO4.4 RN12.7 | length 43.8
  Top Layer w0.381: v1(13.405,-47.904) 13.849,-47.904 IC2.5@13.874,-47.879 16.453,-47.879 16.688,-47.644 RN12.7@18.067,-47.644 ; OPTO4.4@38.601,-49.847 38.652,-49.898 v1(38.652,-52.019)
  Bottom Layer w0.381: v1(13.405,-47.904) 13.405,-55.372 14.065,-56.032 38.449,-56.032 38.652,-55.829 v1(38.652,-52.019)
2QF+: OPTO4.3 RN8.7 | length 3.9
  Top Layer w0.381: OPTO4.3@37.331,-49.847 37.331,-52.095 38.125,-52.889 RN8.7@38.125,-53.456
2QF-OUT: OPTO4.13 RN11.2 | length 16
  Top Layer w0.381: OPTO4.13@38.601,-45.047 38.601,-47.168 v1(38.627,-47.193) ; v1@47.39,-51.594 RN11.2@50.63,-51.594
  Bottom Layer w0.381: v1(38.627,-47.193) 41.218,-47.193 45.663,-51.638 v1(47.39,-51.638)
2QG: IC2.6 OPTO4.6 RN12.6 | length 50
  Top Layer w0.381: v1(13.405,-46.584) 13.849,-46.584 IC2.6@13.874,-46.609 13.9,-46.634 16.224,-46.634 16.434,-46.844 RN12.6@18.067,-46.844 ; v1(41.116,-51.994) 41.141,-51.968 OPTO4.6@41.141,-49.847
  Bottom Layer w0.381: v1(13.405,-46.584) 12.998,-46.584 12.465,-47.117 12.465,-56.083 13.151,-56.769 39.821,-56.769 41.116,-55.474 v1(41.116,-51.994)
2QG+: OPTO4.5 RN8.6 | length 4
  Top Layer w0.381: RN8.6@38.925,-53.456 39.031,-53.351 39.031,-52.733 39.871,-51.892 OPTO4.5@39.871,-49.847
2QG-OUT: OPTO4.11 RN11.3 | length 14.7
  Top Layer w0.381: v1(41.116,-48.768) 41.141,-48.743 OPTO4.11@41.141,-45.047 ; v1(47.39,-52.394) RN11.3@50.63,-52.394
  Bottom Layer w0.381: v1(41.116,-48.768) 41.522,-48.768 45.148,-52.394 v1(47.39,-52.394)
2QH: IC2.7 OPTO4.8 RN12.5 | length 58.1
  Top Layer w0.381: v1(13.405,-45.314) 13.125,-45.314 13.1,-45.339 IC2.7@13.874,-45.339 17.362,-45.339 RN12.5@18.067,-46.044 ; OPTO4.8@43.681,-49.847 43.681,-52.4 43.707,-52.375 v1(43.707,-52.019)
  Bottom Layer w0.381: v1(13.405,-45.314) 12.541,-45.314 11.728,-46.126 11.728,-56.82 12.617,-57.709 41.802,-57.709 43.707,-55.804 v1(43.707,-52.019)
2QH+: OPTO4.7 RN8.5 | length 5.9
  Top Layer w0.381: RN8.5@39.725,-53.456 41.762,-53.456 42.411,-52.807 OPTO4.7@42.411,-49.847
2QH-OUT: OPTO4.9 RN11.4 | length 15.3
  Top Layer w0.381: OPTO4.9@43.681,-45.047 43.681,-44.526 44.748,-44.526 45.51,-45.288 45.51,-52.451 46.253,-53.194 RN11.4@50.63,-53.194
12V: D1.2 D2.2 D3.2 D4.2 D5.2 D6.2 D7.2 D8.2 D9.2 D10.2 D11.2 D12.2 D13.2 D14.2 D15.2 D16.2 HD17.16 LED1.1 LED2.1 LED3.1 LED4.1 LED5.1 LED6.1 LED7.1 LED8.1 LED9.1 LED10.1 LED11.1 LED12.1 LED13.1 LED14.1 LED15.1 LED16.1 OPTO1.10 OPTO1.12 OPTO1.14 OPTO1.16 OPTO2.10 OPTO2.12 OPTO2.14 OPTO2.16 OPTO3.10 OPTO3.12 OPTO3.14 OPTO3.16 OPTO4.10 OPTO4.12 OPTO4.14 OPTO4.16 RL1.5 RL2.5 RL3.5 RL4.5 RL5.5 RL6.5 RL7.5 RL8.5 RL9.5 RL10.5 RL11.5 RL12.5 RL13.5 RL14.5 RL15.5 RL16.5 ULN1.10 ULN2.10 | length 599.5
  Top Layer w0.381: OPTO3.16@24.047,-45.047 24.047,-42.232 24.098,-42.181 ; 26.435,-42.181 26.587,-42.333 OPTO3.14@26.587,-45.047 ; 28.949,-42.181 29.127,-42.359 OPTO3.12@29.127,-45.047 ; OPTO3.10@31.667,-45.047 31.667,-42.181 ; 34.614,-42.181 34.791,-42.359 OPTO4.16@34.791,-45.047 ; 37.103,-42.181 37.331,-42.409 OPTO4.14@37.331,-45.047 ; OPTO4.12@39.871,-45.047 39.871,-42.562 40.252,-42.181 ; OPTO1.16@106.242,-45.047 106.242,-42.282 ; OPTO1.14@108.782,-45.047 108.782,-42.232 ; OPTO1.12@111.322,-45.047 111.322,-42.282 ; OPTO1.10@113.862,-45.047 113.862,-42.384 ; OPTO2.16@117.062,-45.047 117.062,-42.486 ; OPTO2.14@119.602,-45.047 119.602,-42.384 ; OPTO2.12@122.142,-45.047 122.142,-42.536 ; OPTO2.10@124.682,-45.047 124.682,-42.232
  Top Layer w1.143: RL1.5@10.636,-34.214 10.636,-37.948 13.189,-40.5 D1.2@13.25,-40.5 15.703,-40.5 LED1.1@15.716,-40.488 15.716,-41.876 16.021,-42.181 24.098,-42.181 26.435,-42.181 28.949,-42.181 31.007,-42.181 ; LED16.1@17.418,-60.158 18.739,-60.158 ; RL16.5@22.879,-66.446 22.879,-63.449 20.214,-60.784 D16.2@20.214,-60.249 20.123,-60.158 18.739,-60.158 ; RL2.5@27.104,-34.214 27.104,-37.423 29.633,-39.952 D2.2@29.633,-40.5 30.804,-40.5 ; LED2.1@32.099,-40.488 32.086,-40.5 30.804,-40.5 ; RL15.5@39.36,-66.446 39.36,-62.892 D15.2@36.717,-60.249 35.02,-60.249 35.02,-58.04 35.071,-57.989 ; OPTO4.10@42.411,-45.047 42.411,-43.034 41.559,-42.181 ; RL3.5@43.571,-34.214 43.571,-38.056 D3.2@46.016,-40.5 47.441,-40.5 ; LED3.1@48.609,-40.488 48.596,-40.5 47.441,-40.5 ; LED14.1@50.525,-60.158 53.129,-60.158 D14.2@53.22,-60.249 ; 53.22,-58.483 D14.2@53.22,-60.249 ; RL14.5@55.841,-66.446 55.841,-62.87 D14.2@53.22,-60.249 ; RL4.5@60.039,-34.214 60.039,-37.516 62.526,-40.003 D4.2@62.526,-40.5 62.539,-40.488 63.773,-40.488 ; ULN2.10@64.079,-55.194 64.079,-57.965 64.103,-57.989 ; LED4.1@64.992,-40.488 63.773,-40.488 ; LED13.1@67.078,-60.158 68.37,-60.158 ; RL13.5@72.322,-66.446 72.322,-62.848 D13.2@69.722,-60.249 69.632,-60.158 68.37,-60.158 ; RL5.5@76.651,-34.29 76.651,-37.823 D5.2@79.265,-40.437 80.715,-40.437 ; LED5.1@81.985,-40.424 81.972,-40.437 80.715,-40.437 ; ULN1.10@85.26,-45.11 85.26,-42.306 ; RL12.5@88.803,-66.446 88.803,-62.827 D12.2@86.225,-60.249 84.652,-60.249 84.753,-60.147 84.753,-57.989 ; RL6.5@93.118,-34.29 93.118,-37.78 D6.2@95.775,-40.437 ; LED6.1@98.241,-40.424 95.787,-40.424 D6.2@95.775,-40.437 ; LED11.1@100.186,-60.158 101.411,-60.158 ; RL11.5@105.284,-66.446 105.284,-62.805 D11.2@102.728,-60.249 102.637,-60.158 101.411,-60.158 ; RL7.5@109.586,-34.29 109.586,-37.865 D7.2@112.158,-40.437 ; LED7.1@114.751,-40.424 112.17,-40.424 D7.2@112.158,-40.437 ; RL10.5@121.765,-66.446 121.765,-62.783 D10.2@119.23,-60.249 119.14,-60.158 117.799,-60.158 118.078,-59.879 118.078,-57.989 ; RL8.5@126.054,-34.29 126.054,-37.823 126.917,-38.686 126.917,-40.513 ; v1(126.308,-42.181) 112.058,-42.181 ; v1@126.917,-42.181 126.917,-40.513 ; LED8.1@131.134,-40.424 131.121,-40.437 D8.2@128.668,-40.437 126.993,-40.437 126.917,-40.513 ; LED9.1@133.293,-60.198 135.682,-60.198 D9.2@135.733,-60.249 ; RL9.5@138.246,-66.446 138.246,-62.761 D9.2@135.733,-60.249 ; 18.739,-60.158 18.739,-58.395 18.713,-58.369 19.093,-57.989 35.071,-57.989 ; 30.804,-40.5 30.804,-41.978 31.007,-42.181 ; 31.007,-42.181 31.667,-42.181 34.614,-42.181 37.103,-42.181 40.252,-42.181 41.559,-42.181 ; 35.071,-57.989 64.103,-57.989 ; 41.559,-42.181 47.237,-42.181 ; 47.237,-42.181 47.441,-41.978 47.441,-40.5 ; 47.237,-42.181 63.671,-42.181 ; 63.671,-42.181 63.671,-40.589 63.773,-40.488 ; 63.671,-42.181 80.715,-42.181 ; 64.103,-57.989 68.651,-57.989 ; 68.37,-60.158 68.37,-58.471 68.751,-58.09 68.651,-57.989 ; 68.651,-57.989 84.753,-57.989 ; 80.715,-42.181 80.715,-40.437 ; 80.715,-42.181 95.599,-42.181 ; 84.753,-57.989 101.543,-57.989 ; 95.599,-42.181 112.058,-42.181 ; 95.599,-42.181 95.599,-40.612 D6.2@95.775,-40.437 ; 101.411,-60.158 101.543,-60.027 101.543,-57.989 ; 101.543,-57.989 118.078,-57.989 ; 112.058,-42.181 112.158,-42.081 D7.2@112.158,-40.437 ; 118.078,-57.989 135.199,-57.989 135.733,-58.524 D9.2@135.733,-60.249
  Bottom Layer w1.143: v1(126.308,-42.181) 126.401,-42.088 141.979,-42.088 142.945,-41.123 142.945,-31.115 145.916,-28.143 157.651,-28.143 160.579,-31.071 160.579,-65.475 160.572,-65.481 ; RL9.5@138.246,-66.446 140.303,-66.446 140.709,-66.853 140.659,-66.904 140.659,-71.984 145.777,-77.102 159.848,-77.102 160.572,-76.378 160.572,-65.481 ; HD17.16@152.774,-61.722 160.572,-61.722 160.572,-65.481
  other v1: 127.044,-42.291
COM1: HD1.2 JN1.1 RL1.1 | length 38
  Bottom Layer w2: JN1.1@11.398,-2.896 11.419,-2.916 HD1.2@15.895,-2.916 ; HD1.2@15.895,-8.407 15.895,-35.917 RL1.1@16.732,-36.754 ; HD1.2@15.895,-7.916 15.895,-6.646 HD1.2@15.895,-3.094
COM2: HD2.2 JN2.1 RL2.1 | length 38.8
  Bottom Layer w2: HD2.2@32.363,-7.916 HD2.2@32.363,-7.798 ; HD2.2@32.363,-2.916 HD2.2@32.363,-7.798 ; RL2.1@33.2,-36.754 32.363,-35.917 HD2.2@32.363,-7.798
  Bottom Layer w2.5: JN2.1@27.908,-2.896 27.929,-2.916 HD2.2@32.363,-2.916
COM3: HD3.2 JN3.1 RL3.1 | length 38.7
  Bottom Layer w2: JN3.1@44.291,-2.896 48.809,-2.896 HD3.2@48.83,-2.916 HD3.2@48.83,-7.916 48.83,-35.917 RL3.1@49.667,-36.754
COM4: HD4.2 JN4.1 RL4.1 | length 38.7
  Bottom Layer w2: HD4.2@65.298,-2.916 HD4.2@65.298,-7.916 65.298,-35.917 RL4.1@66.135,-36.754
  Bottom Layer w2.5: JN4.1@60.801,-2.896 60.822,-2.916 HD4.2@65.298,-2.916
COM5: HD5.2 JN5.1 RL5.1 | length 38.6
  Bottom Layer w2: HD5.2@82.037,-2.916 HD5.2@82.037,-7.916 82.037,-36.12 RL5.1@82.747,-36.83
  Bottom Layer w2.5: JN5.1@77.667,-2.896 77.687,-2.916 HD5.2@82.037,-2.916
COM6: HD6.2 JN6.1 RL6.1 | length 38.8
  Bottom Layer w2: HD6.2@98.42,-7.916 HD6.2@98.42,-7.772 ; HD6.2@98.42,-2.916 HD6.2@98.42,-7.772 ; RL6.1@99.214,-36.83 98.42,-36.035 HD6.2@98.42,-7.772
  Bottom Layer w2.5: JN6.1@94.05,-2.896 94.07,-2.916 HD6.2@98.42,-2.916
COM7: HD7.2 JN7.1 RL7.1 | length 38.7
  Bottom Layer w2: JN7.1@110.433,-2.896 114.782,-2.896 HD7.2@114.803,-2.916 HD7.2@114.803,-7.916 ; HD7.2@114.803,-7.874 114.803,-35.951 RL7.1@115.682,-36.83
COM8: HD8.2 JN8.1 RL8.1 | length 38.9
  Bottom Layer w2: HD8.2@131.186,-7.916 HD8.2@131.186,-7.747 ; HD8.2@131.186,-2.916 HD8.2@131.186,-7.747 ; RL8.1@132.15,-36.83 131.186,-35.866 HD8.2@131.186,-7.747
  Bottom Layer w2.5: JN8.1@126.816,-2.896 126.836,-2.916 HD8.2@131.186,-2.916
COM9: HD9.2 JN9.1 RL9.1 | length 38.4
  Bottom Layer w2: RL9.1@132.15,-63.906 132.72,-64.477 HD9.2@132.72,-92.464 HD9.2@132.72,-97.464 132.801,-97.384 JN9.1@137.255,-97.384
COM10: HD10.2 JN10.1 RL10.1 | length 38.5
  Bottom Layer w2: RL10.1@115.669,-63.906 116.257,-64.495 HD10.2@116.257,-92.541 ; HD10.2@116.257,-92.464 HD10.2@116.257,-92.541 ; JN10.1@120.818,-97.384 120.737,-97.464 HD10.2@116.257,-97.464 HD10.2@116.257,-92.541
COM11: HD11.2 JN11.1 RL11.1 | length 38.4
  Bottom Layer w2: RL11.1@99.188,-63.906 99.795,-64.513 HD11.2@99.795,-92.464 HD11.2@99.795,-97.464 99.875,-97.384 JN11.1@104.38,-97.384
COM12: HD12.2 JN12.1 RL12.1 | length 38.6
  Bottom Layer w2: RL12.1@82.707,-63.906 83.332,-64.531 HD12.2@83.332,-92.558 ; HD12.2@83.332,-92.464 83.332,-92.541 HD12.2@83.332,-97.464 83.413,-97.384 JN12.1@87.943,-97.384
COM13: HD13.2 JN13.1 RL13.1 | length 38.5
  Bottom Layer w2: RL13.1@66.226,-63.906 66.869,-64.55 HD13.2@66.869,-92.464 HD13.2@66.869,-97.464 66.95,-97.384 JN13.1@71.505,-97.384
COM14: HD14.2 JN14.1 RL14.1 | length 38.6
  Bottom Layer w2: RL14.1@49.745,-63.906 50.406,-64.568 HD14.2@50.406,-92.541 ; HD14.2@50.406,-92.464 HD14.2@50.406,-92.541 ; JN14.1@55.068,-97.384 50.487,-97.384 HD14.2@50.406,-97.464 HD14.2@50.406,-92.541
COM15: HD15.2 JN15.1 RL15.1 | length 38.6
  Bottom Layer w2: RL15.1@33.264,-63.906 33.943,-64.586 HD15.2@33.943,-92.464 HD15.2@33.943,-97.464 34.024,-97.384 JN15.1@38.63,-97.384
COM16: HD16.2 JN16.1 RL16.1 | length 38.6
  Bottom Layer w2: RL16.1@16.783,-63.906 17.48,-64.604 HD16.2@17.48,-92.464 HD16.2@17.48,-97.464 22.112,-97.464 JN16.1@22.193,-97.384
DS: DS.5 IC1.14 | length 41.5
  Top Layer w0.381: v1(130.854,-50.444) 132.391,-50.444 IC1.14@132.417,-50.419 ; v1(153.892,-44.475) 155.137,-44.475 155.67,-43.942 v1@155.67,-36.855
  Bottom Layer w0.381: v1(130.854,-50.444) 134.08,-50.444 134.893,-49.632 134.893,-45.415 135.858,-44.45 135.883,-44.475 v1(153.892,-44.475) ; DS.5@152.774,-36.855 152.825,-36.805 v1(155.619,-36.805)
DS_IN: DS.3 DS.4 HD17.11 | length 37
  Top Layer w0.381: v1(147.034,-39.421) 147.034,-40.792 150.107,-43.866 v1(150.107,-45.542)
  Bottom Layer w0.381: v1(150.107,-45.542) 151.352,-45.542 152.774,-46.965 HD17.11@152.774,-49.022
  Bottom Layer w0.5: DS.3@150.234,-39.37 144.519,-39.37 144.519,-32.08 145.053,-31.547 152.774,-31.547 DS.4@152.774,-34.315
DS_OUT: IC1.9 IC2.14 | length 179.1
  Top Layer w0.381: 131.261,-44.069 IC1.9@132.417,-44.069
  Top Layer w0.8: IC2.14@8.629,-50.419 IC2.14@9.074,-50.419 v1(10.052,-50.419) ; v1(10.153,-44.399) 10.153,-43.561 8.172,-41.58 8.172,-31.344 9.595,-29.921 140.709,-29.921 141.7,-30.912 141.7,-40.386 139.643,-42.443 131.845,-42.443 131.261,-43.028 131.261,-44.069
  Bottom Layer w0.8: v1(10.052,-50.419) 10.153,-50.317 v1(10.153,-44.399)
DS_OUT2: DS.2 IC2.9 | length 166.5
  Top Layer w0.8: IC2.9@9.074,-44.069 7.563,-44.069 6.699,-43.205 6.699,-30.175 8.071,-28.804 143.097,-28.804 145.612,-31.318 v1(145.612,-36.881)
  Bottom Layer w0.381: v1(145.612,-36.881) 145.637,-36.855 DS.2@150.234,-36.855
GND: C1.2 C2.2 HD17.20 IC1.8 IC1.13 IC2.8 IC2.13 | length 244.8
  Top Layer w0.762: C2.2@4.743,-50.389 4.743,-49.505 4.642,-49.403 4.896,-49.149 IC2.13@9.074,-49.149 10.915,-49.149 11.068,-48.997 11.068,-45.542 12.541,-44.069 IC2.8@13.874,-44.069 ; C1.2@129.102,-50.389 130.342,-49.149 IC1.13@132.417,-49.149 133.699,-49.149 134.156,-48.692 134.156,-45.517 135.604,-44.069 IC1.8@137.217,-44.069 146.145,-44.069 147.644,-45.568 v1(147.644,-46.101)
  Top Layer w1: 144.469,-72.72 146.027,-72.72 147.069,-73.762 152.606,-73.762 152.774,-73.93 HD17.20@152.774,-71.882
  Top Layer w1.143: v1(6.75,-72.619) 6.851,-72.72 144.469,-72.72
  Bottom Layer w1.143: v1(6.75,-72.619) 6.75,-49.327 ; v1(147.644,-46.101) 147.644,-73.609 147.694,-73.558 152.647,-73.558 152.774,-73.431 HD17.20@152.774,-71.882
  other v1: 6.928,-49.149 147.872,-45.872
  other v3: 152.8,-73.558
N_CHAN: HDC1.1 JN2.2 JN4.2 JN6.2 JN8.2 pad.0@142.411,-9.881 pad.1 | length 180.4
  Top Layer w2.5: v2(28.086,-12.344) 28.187,-12.243 v2(125.317,-12.243) v2(126.816,-12.243) v2(128.416,-12.243) 142.005,-12.243
  Bottom Layer w2: v2@28.086,-12.217 v2@28.187,-12.116 ; v2(60.801,-12.344) JN4.2@60.801,-5.461 ; v2@60.801,-12.217 v2@60.903,-12.116 ; v2(94.024,-12.268) v2(94.05,-12.243) JN6.2@94.05,-5.461 ; v2@94.05,-12.116 v2@94.151,-12.014 ; v2@126.816,-12.217 JN8.2@126.816,-5.461 ; v2@126.816,-12.116 v2@126.917,-12.014
  Bottom Layer w2.5: JN2.2@27.908,-5.67 28.086,-5.848 v2(28.086,-12.344) ; pad.0@142.411,-10.135 142.417,-10.14 142.417,-20.295 144.164,-22.042 150.603,-22.042 150.638,-22.076 151.565,-21.148 HDC1.1@151.565,-7.916 HDC1.1@151.565,-2.916
  other v2: 26.587,-12.344 29.686,-12.344 59.302,-12.344 62.401,-12.344 92.551,-12.243 95.65,-12.243